# Altium PCB SOT-89-3_L4.5-W2.5-P1.50-LS4.2-BR.pcbdoc
Units mm, origin at the board's own origin, x right, y up, seen from the top; angles counter-clockwise.
Board outline 18.08 x 17.35 mm, 2 copper layers (Top Layer, Bottom Layer); 1 components, 0 nets, 3 pads, 0 vias.
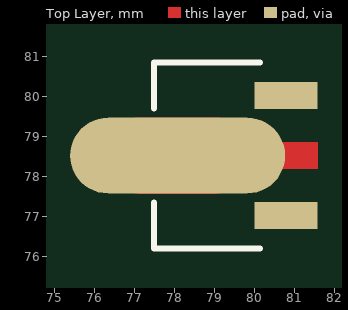
[diagram p0: Top Layer view]
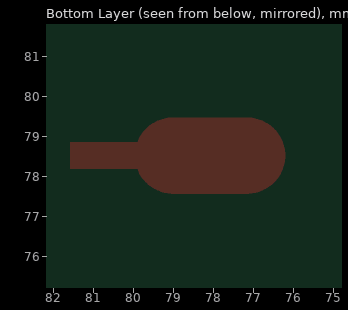
[diagram p1: Bottom Layer view, seen from below]

## Layer stack, top to bottom
Top Layer: signal copper (thickness not stored)
Dielectric: dielectric 0.32, FR-4, Dk 4.8
Bottom Layer: signal copper (thickness not stored)

## Board outline
87.927,69.85 69.85,69.85 69.85,87.202 87.927,87.202

## Components (designator, comment, footprint, x,y, rotation, side; value= is the part's Value field where it differs from the comment)
? "SOT-89-3_L4.5-W2.5-P1.50-LS4.2-BR" SOT-89-3_L4.5-W2.5-P1.50-LS4.2-BR 79.433,78.526 r0 top

## Footprints (in the part's own frame and the unit in brackets; to place one, negate y for a bottom-side part, rotate by r counter-clockwise, add the part's x,y. Pads: shape width x height; smd on the part's side, far side on the other; paste and mask are expansions set on the pad)
SOT-89-3_L4.5-W2.5-P1.50-LS4.2-BR [mm]
  rect 1.575x0.672 smd: 1(1.356,-1.5) 3(1.356,1.5)
  oval 5.377x1.9 smd: 2(-1.356,0)
  Top Layer region: -2.283,0.95 -0.429,0.95 -0.384,0.949 -0.34,0.946 -0.296,0.94 -0.252,0.933 -0.208,0.924 -0.165,0.912 -0.123,0.899 -0.081,0.884 -0.04,0.866 0,0.847 0.04,0.826 0.078,0.803 0.115,0.779 0.151,0.752 0.185,0.724 0.219,0.695 0.251,0.664 0.281,0.631 0.31,0.597 0.337,0.562 0.362,0.525 0.386,0.488 0.408,0.449 0.428,0.409 0.447,0.33 2.144,0.33 2.144,-0.33 0.447,-0.33 0.428,-0.409 0.408,-0.449 0.386,-0.488 0.362,-0.526 0.337,-0.562 0.31,-0.597 0.281,-0.631 0.251,-0.664 0.219,-0.695 0.185,-0.725 0.151,-0.753 0.115,-0.779 0.078,-0.804 0.04,-0.827 0,-0.848 -0.04,-0.867 -0.081,-0.884 -0.123,-0.899 -0.165,-0.913 -0.208,-0.924 -0.252,-0.934 -0.296,-0.941 -0.34,-0.946 -0.384,-0.949 -0.429,-0.95 -2.283,-0.95 -2.328,-0.949 -2.372,-0.946 -2.416,-0.941 -2.46,-0.934 -2.504,-0.924 -2.547,-0.913 -2.589,-0.899 -2.631,-0.884 -2.672,-0.867 -2.713,-0.848 -2.752,-0.827 -2.79,-0.804 -2.827,-0.779 -2.863,-0.753 -2.898,-0.725 -2.931,-0.695 -2.963,-0.664 -2.993,-0.631 -3.022,-0.597 -3.049,-0.562 -3.075,-0.526 -3.098,-0.488 -3.12,-0.449 -3.141,-0.409 -3.159,-0.369 -3.175,-0.327 -3.189,-0.285 -3.202,-0.242 -3.212,-0.199 -3.22,-0.155 -3.227,-0.111 -3.231,-0.067 -3.233,-0.022 -3.233,0.022 -3.231,0.067 -3.227,0.111 -3.22,0.155 -3.212,0.199 -3.202,0.242 -3.189,0.285 -3.175,0.327 -3.159,0.369 -3.141,0.409 -3.12,0.449 -3.098,0.488 -3.075,0.525 -3.049,0.562 -3.022,0.597 -2.993,0.631 -2.963,0.664 -2.931,0.695 -2.898,0.724 -2.863,0.752 -2.827,0.779 -2.79,0.803 -2.752,0.826 -2.713,0.847 -2.672,0.866 -2.631,0.884 -2.589,0.899 -2.547,0.912 -2.504,0.924 -2.46,0.933 -2.416,0.94 -2.372,0.946 -2.328,0.949
  silkscreen extent -1.95,-2.33 0.7,2.33

## Nets (pads, with @x,y where several pads share a name; then routed paths per layer and width w, separated by ;. In a path a pad name is that pad's centre, name@x,y a point inside that pad or via, vN(x,y) a via of type N, cw(c..) or ccw(c..) an arc to the next point about the centre after c; other vN are vias at no path point)
pads on no net: ?.1 ?.2 ?.3